# Altium PCB PCBV2-01.PcbDoc (part 1 of 2)
Units mm, origin at the board's own origin, x right, y up, seen from the top; angles counter-clockwise.
Board outline 152.4 x 101.6 mm, 2 copper layers (Top Layer, Bottom Layer); 97 components, 117 nets, 452 pads, 185 vias.
Unrouted connection lines stored in the file: 1.
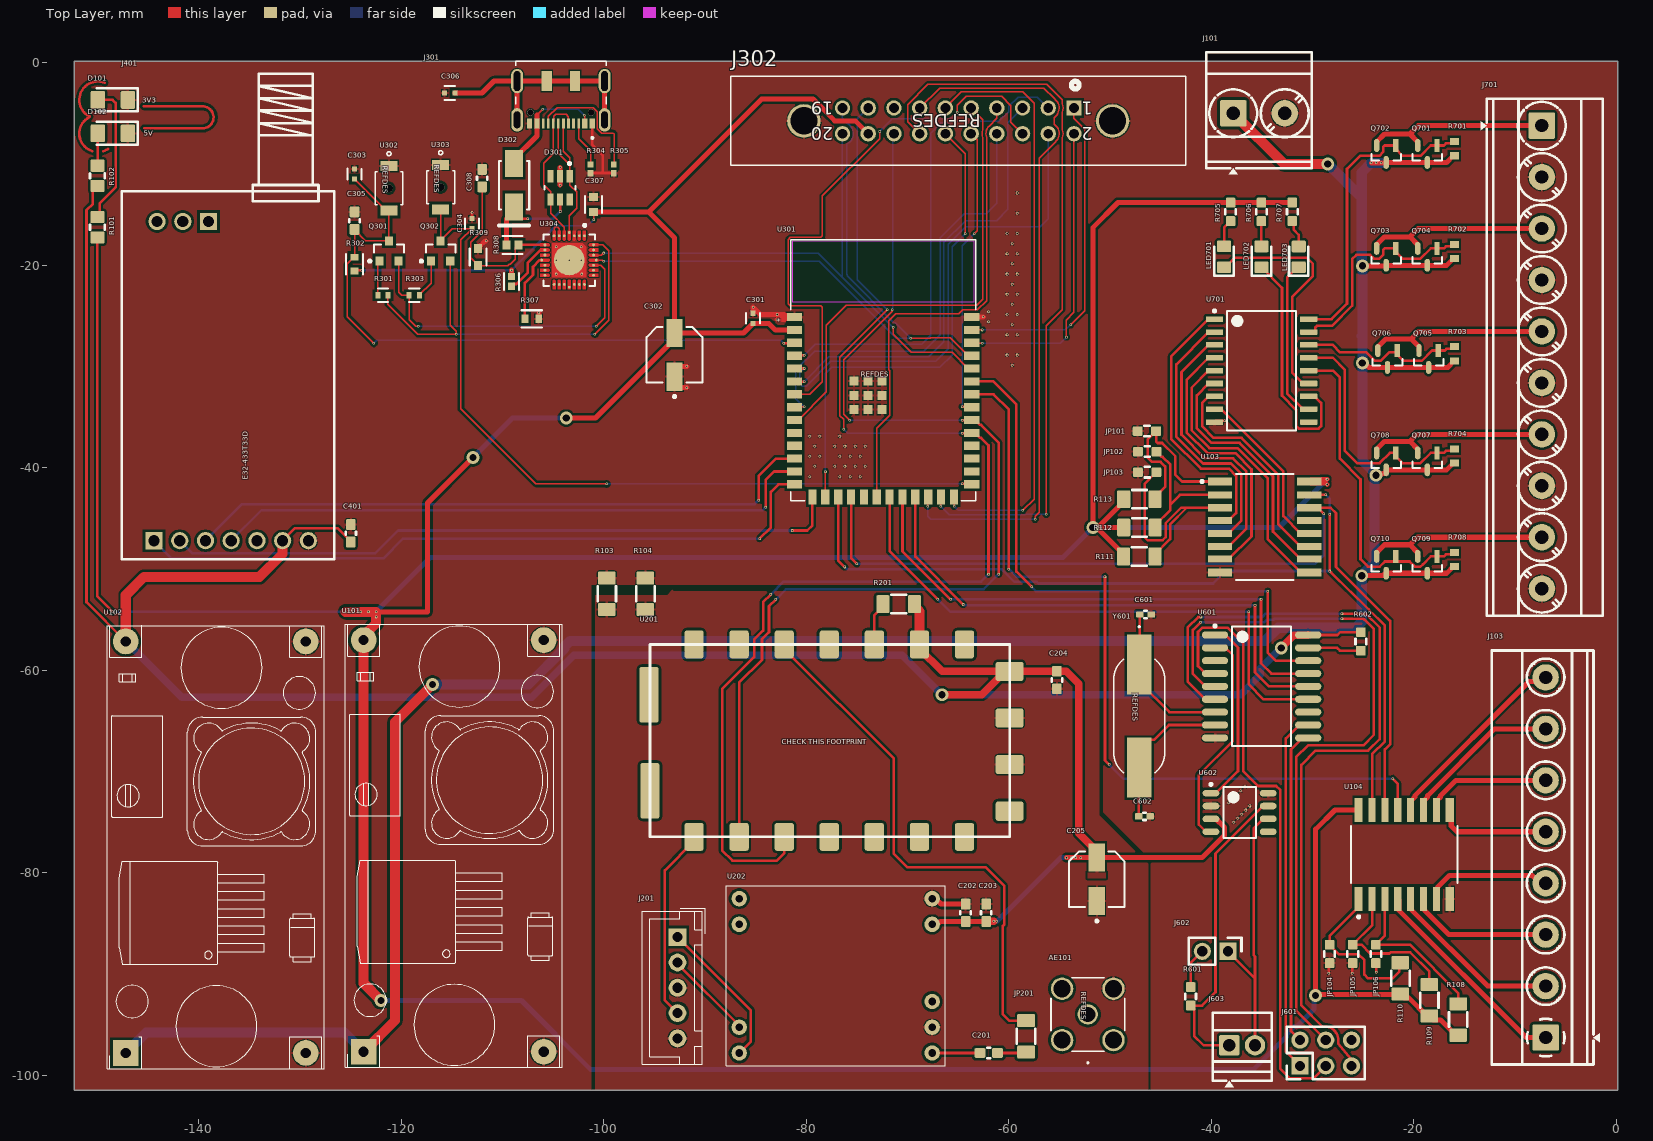
[diagram p0: Top Layer view]
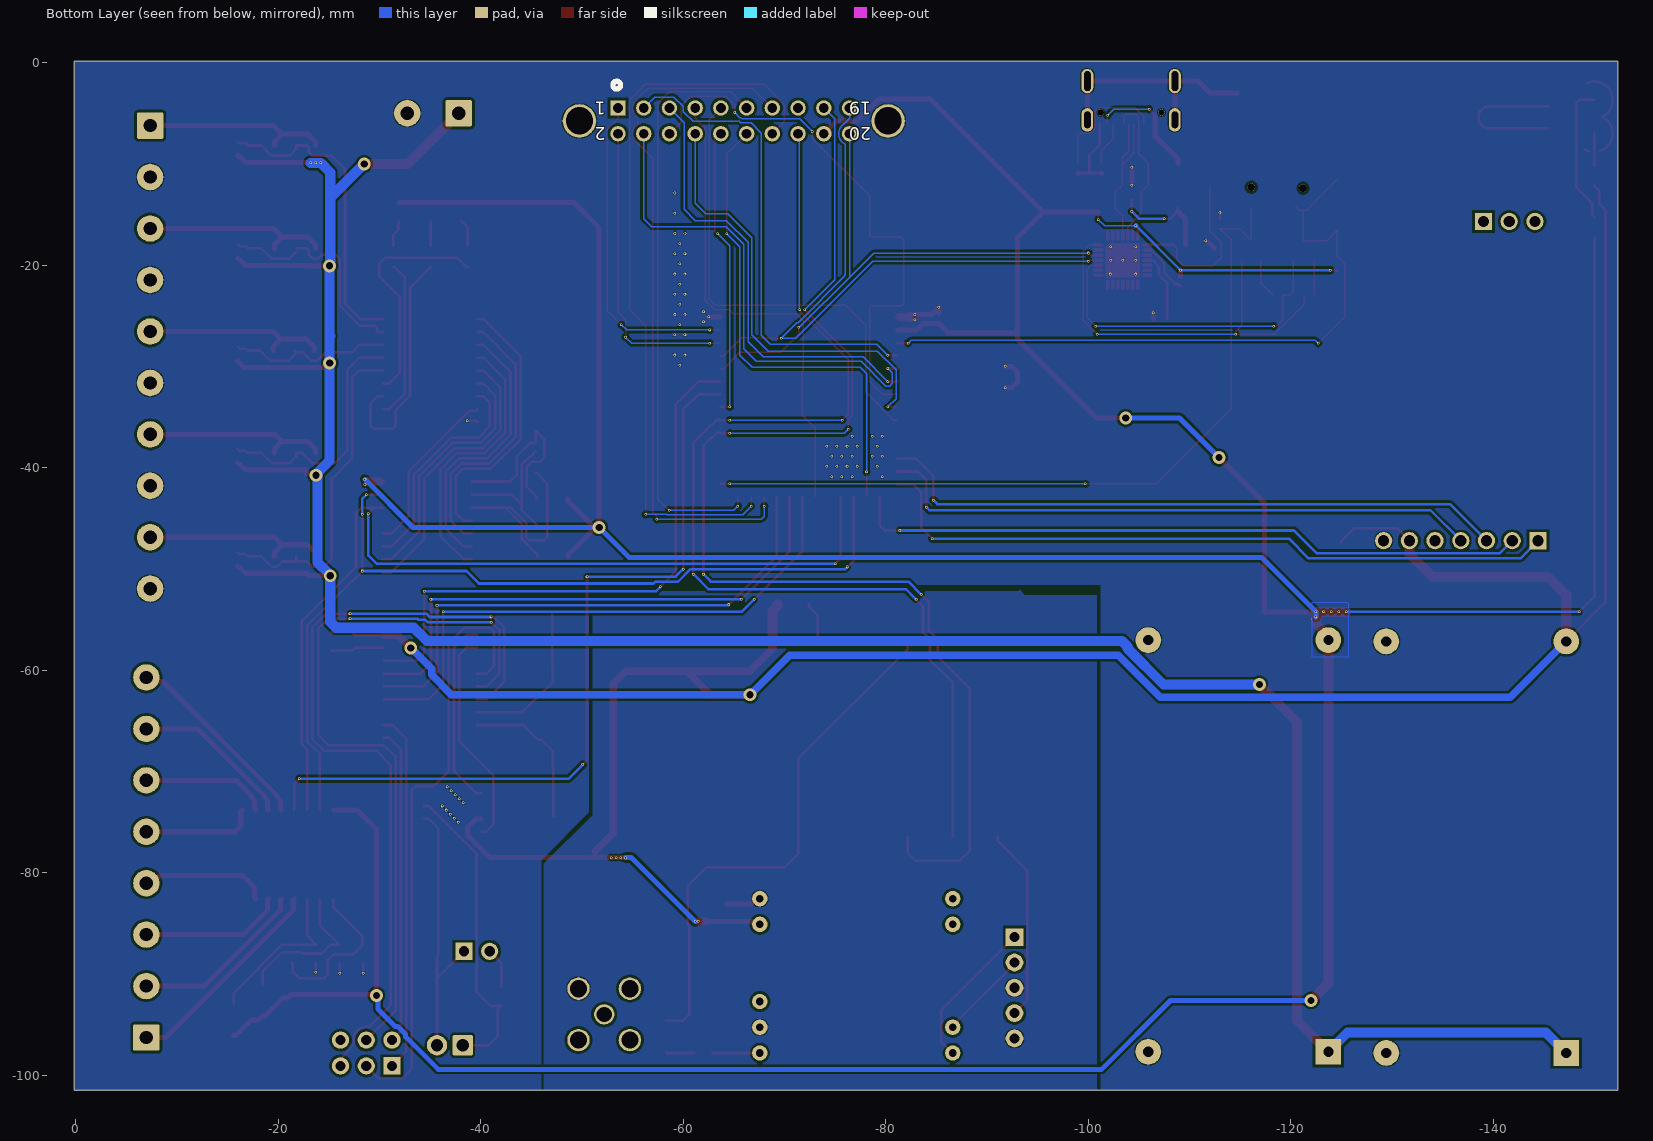
[diagram p1: Bottom Layer view, seen from below]

## Layer stack, top to bottom
Top Solder: solder mask 0.0102, Solder Resist, Dk 3.5
Top Layer: signal copper 0.0356
Dielectric 1: dielectric 0.32, FR-4, Dk 4.8
Bottom Layer: signal copper 0.0356
Bottom Solder: solder mask 0.0102, Solder Resist, Dk 3.5

## Board outline
-152.273,-101.473 0.127,-101.473 0.127,0.127 -152.273,0.127

## Design rules (kind name [scope] priority, off if disabled: settings)
Clearance "QFN28 Clearance" [HasFootprint('FP-CP2102N-A02-GQFN28R-MFG')] p1: gap=0.1 ignorepadtopadclearanceinfootprint=FALSE
Clearance USBC_Footprint [HasFootprint('JAE_DX07S016JA1R1500')] p2: gap=0.1 ignorepadtopadclearanceinfootprint=FALSE
Clearance [All] p3: gap=0.254 ignorepadtopadclearanceinfootprint=TRUE except(0.125: SMDPad-SMDPad)
PolygonConnect [All] p1: connectstyle=Relief reliefconductorwidth=0.254 reliefentries=4 polygonreliefangle="90 Angle" airgapwidth=0.1
RoutingVias [All] p1: holewidth=0.711 width=1.27 viastyle="Through Hole" minholewidth=0.711 minwidth=1.27 maxholewidth=0.711 maxwidth=1.27 useviatemplates=TRUE viatemplateguid#1={12063279-9FBE-486A-9D9A-ABACD37B87B8} viatemplatename#1=v25h15m0mx0
SolderMaskExpansion [All] p1: expansion=0.102 istentingtop=FALSE
SupplyNets "Schematic Supply Nets" [InNet('+3.3V')] p1: voltage=0.000
SupplyNets "Schematic Supply Nets_5" [InNet('+12V')] p2: voltage=0.000
SupplyNets "Schematic Supply Nets_3" [InNet('GNDA')] p3: voltage=0.000
SupplyNets "Schematic Supply Nets_2" [InNet('GNDD')] p4: voltage=0.000
SupplyNets "Schematic Supply Nets_1" [InNet('+5V')] p5: voltage=0.000
UnpouredPolygon USB_C_ModifiedPoly [HasFootprint('JAE_DX07S016JA1R1500')] p1: allowunpoured=TRUE allowshelved=TRUE
UnpouredPolygon [All] p2:
Width [All] p1: maxlimit=1 minlimit=0.125 preferedwidth=0.125 minimp=50.000000 maximp=50.000000 favimp=50.000000
29 further rules are at their usual default settings.

## Classes and differential pairs
component class U_ULN2803+MOSFETS: J701 LED701 LED702 LED703 Q701 Q702 Q703 Q704 Q705 Q706 Q707 Q708 Q709 Q710 R5 R6 R7 R701 R702 R703 R704 R705 R706 R707 R708 U1 U701
component class "RF Voice": C201 C202 C203 C204 C205 J201 J202 JP201 R201 RV201 U201 U202 U203
component class Microcontroller: C301 C302 C303 C304 C305 C306 C307 C308 D301 D302 J301 J302 Q301 Q302 R301 R302 R303 R304 R305 R306 R307 R308 R309 U301 U302 U303 U304
component class LORA: C401 J401
component class Display: J501
component class "CAR PCB": AE101 D101 D102 J101 J103 JP101 JP102 JP103 JP104 JP105 JP106 R101 R102 R103 R104 R108 R109 R110 R111 R112 R113 U101 U102 U103 U104
component class CAN_Module: C601 C602 J601 J602 J603 R601 R602 U601 U602 Y601

## Components (designator, comment, footprint, x,y, rotation, side; value= is the part's Value field where it differs from the comment)
AE101 "Antenna_Shield" 132134_AMP -52.197,-93.98 r270 top
C201 "2.2uF" C_0603_1608Metric_Pad1.08x0.95mm_HandSolder -61.976,-97.79 r180 top
C202 "1uF" C_0603_1608Metric_Pad1.08x0.95mm_HandSolder -64.262,-83.947 r270 top
C203 ".1uF" C_0603_1608Metric_Pad1.08x0.95mm_HandSolder -62.23,-83.947 r270 top
C204 "0.1uF" C_0603_1608Metric_Pad1.08x0.95mm_HandSolder -55.245,-60.96 r270 top
C205 "EEEFK1V100R" FP-FKC-MFG -51.308,-80.636 r90 top
C301 "0.1uF" FP-CC0402-MFG -85.25,-25.25 r90 top value="100 nF"
C302 "EEEFK1V100R" FP-FKC-MFG -93,-28.85 r90 top
C303 "0.1uF" FP-CC0402-MFG -124.6,-11 r90 top value="100 nF"
C304 "0.1uF" FP-CC0402-MFG -113,-15.9 r90 top value="100 nF"
C305 "1uF" C_0603_1608Metric_Pad1.08x0.95mm_HandSolder -124.6,-15.6 r90 top
C306 "0.1uF" FP-CC0402-MFG -115.2,-3 r180 top value="100 nF"
C307 "1uF" FP-CC0603-DA-MFG -101,-14 r90 top value="1 uF"
C308 "1uF" C_0603_1608Metric_Pad1.08x0.95mm_HandSolder -112,-11.4 r90 top
C401 "1uF" C_0603_1608Metric_Pad1.08x0.95mm_HandSolder -124.968,-46.482 r90 top
C601 "30" C_0402_1005Metric_Pad0.74x0.62mm_HandSolder -46.482,-54.483 r180 top
C602 "30" C_0402_1005Metric_Pad0.74x0.62mm_HandSolder -46.609,-74.422 r180 top
D101 "LED" LED_1206_3216Metric_Pad1.42x1.75mm_HandSolder -148.463,-3.683 r180 top
D102 "LED" LED_1206_3216Metric_Pad1.42x1.75mm_HandSolder -148.463,-6.985 r180 top
D301 "USBLC6-4SC6" FP-SOT23-6L-MFG -104.3,-12.375 r270 top value=3pF
D302 "SS16" FAIR-SMA-2_B_V -108.85,-12.1 r270 top
J101 "Screw_Terminal_01x02" TerminalBlock_Phoenix_MKDS-3-2-5.08_1x02_P5.08mm_Horizontal -37.83,-5 r0 top
J103 "XY2500 RDS" TerminalBlock_Phoenix_MKDS-1,5-8-5.08_1x08_P5.08mm_Horizontal -6.985,-96.266 r90 top
J201 "Conn_01x05" JST_XH_B05B-XH-A_05x2.50mm_Straight -92.71,-86.353 r270 top
J301 "DX07S016JA1R1500" JAE_DX07S016JA1R1500 -104.225,-4.925 r180 top
J302 "5499922-4" CON20_2X10_SHM_TEC -53.56,-4.48 r180 top
J401 "LORA Module E32-433D" E32-433T33D-EDITEDSIZE -136.779,-19.685 r90 top
J601 "Conn_02x03_Odd_Even" PinHeader_2x03_P2.54mm_Vertical -31.242,-99.06 r90 top
J602 "Conn_01x02_Pin" PinHeader_1x02_P2.54mm_Vertical -38.35,-87.75 r270 top
J603 "Screw_Terminal_01x02" TerminalBlock_Xinya_XY308-2.54-2P_1x02_P2.54mm_Horizontal -38.227,-97.028 r0 top
J701 "CONN_1924389" TerminalBlock_Phoenix_MKDS-3-10-5.08_1x10_P5.08mm_Horizontal -7.366,-6.223 r270 top
JP101 "SolderJumper_2_Bridged" R_0603_1608Metric_Pad0.98x0.95mm_HandSolder -46.362,-36.381 r0 top
JP102 "SolderJumper_2_Bridged" R_0603_1608Metric_Pad0.98x0.95mm_HandSolder -46.338,-38.413 r0 top
JP103 "SolderJumper_2_Bridged" R_0603_1608Metric_Pad0.98x0.95mm_HandSolder -46.338,-40.445 r0 top
JP104 "SolderJumper_2_Bridged" R_0603_1608Metric_Pad0.98x0.95mm_HandSolder -28.321,-88.011 r90 top
JP105 "SolderJumper_2_Bridged" R_0603_1608Metric_Pad0.98x0.95mm_HandSolder -26.035,-88.011 r90 top
JP106 "SolderJumper_2_Open" R_0603_1608Metric_Pad0.98x0.95mm_HandSolder -23.749,-88.011 r90 top
JP201 "SolderJumper_2_Open" R_1206_3216Metric_Pad1.30x1.75mm_HandSolder -58.293,-96.139 r270 top
LED701 "LED" LED_0805_2012Metric_Pad1.15x1.40mm_HandSolder -38.735,-19.168 r90 top
LED702 "LED" LED_0805_2012Metric_Pad1.15x1.40mm_HandSolder -35.052,-19.177 r90 top
LED703 "LED" LED_0805_2012Metric_Pad1.15x1.40mm_HandSolder -31.369,-19.177 r90 top
Q301 "BC849CLT1G" ONSC-SOT-23-3-318-08_V -121.2,-18.6 r90 top
Q302 "BC849CLT1G" ONSC-SOT-23-3-318-08_V -116.1,-18.6 r90 top
Q701 "3b9c635fedb024a5347a57b145af9cc" FP-S-03946-IPC_C -18.669,-9.017 r270 top
Q702 "3b9c635fedb024a5347a57b145af9cc" FP-S-03946-IPC_C -22.733,-9.017 r270 top
Q703 "3b9c635fedb024a5347a57b145af9cc" FP-S-03946-IPC_C -22.733,-19.177 r270 top
Q704 "3b9c635fedb024a5347a57b145af9cc" FP-S-03946-IPC_C -18.669,-19.177 r270 top
Q705 "3b9c635fedb024a5347a57b145af9cc" FP-S-03946-IPC_C -18.542,-29.264 r270 top
Q706 "3b9c635fedb024a5347a57b145af9cc" FP-S-03946-IPC_C -22.606,-29.264 r270 top
Q707 "3b9c635fedb024a5347a57b145af9cc" FP-S-03946-IPC_C -18.669,-39.37 r270 top
Q708 "3b9c635fedb024a5347a57b145af9cc" FP-S-03946-IPC_C -22.733,-39.37 r270 top
Q709 "3b9c635fedb024a5347a57b145af9cc" FP-S-03946-IPC_C -18.669,-49.584 r270 top
Q710 "3b9c635fedb024a5347a57b145af9cc" FP-S-03946-IPC_C -22.733,-49.584 r270 top
R101 "220" R_0805_2012Metric_Pad1.20x1.40mm_HandSolder -149.987,-16.256 r90 top
R102 "220" R_0805_2012Metric_Pad1.20x1.40mm_HandSolder -149.987,-11.176 r90 top
R103 "0" R_1206_3216Metric_Pad1.30x1.75mm_HandSolder -99.695,-52.451 r270 top
R104 "0" R_1206_3216Metric_Pad1.30x1.75mm_HandSolder -95.885,-52.451 r270 top
R108 "10k" R_1206_3216Metric_Pad1.30x1.75mm_HandSolder -15.621,-94.488 r90 top
R109 "1k" R_1206_3216Metric_Pad1.30x1.75mm_HandSolder -18.479,-92.583 r90 top value=10k
R110 "1k" R_1206_3216Metric_Pad1.30x1.75mm_HandSolder -21.336,-90.424 r90 top value=10k
R111 "1k" R_1206_3216Metric_Pad1.30x1.75mm_HandSolder -47.117,-48.768 r0 top value=10k
R112 "1k" R_1206_3216Metric_Pad1.30x1.75mm_HandSolder -47.1,-45.906 r0 top value=10k
R113 "1k" R_1206_3216Metric_Pad1.30x1.75mm_HandSolder -47.1,-43.112 r0 top value=10k
R201 "10k" R_1206_3216Metric_Pad1.30x1.75mm_HandSolder -70.866,-53.467 r180 top
R301 "AC0402FR-0710KL" FP-AC0402-MFG -121.8,-22.973 r180 top
R302 "10k" FP-RC0603-0_55-IPC_C -124.6,-19.9 r270 top
R303 "AC0402FR-0710KL" FP-AC0402-MFG -118.708,-22.973 r0 top
R304 "5.1k" RESC1005X40X25NL05T10 -101.3,-10.5 r90 top
R305 "5.1k" RESC1005X40X25NL05T10 -99,-10.5 r90 top
R306 "1k" FP-RC0402-0_4-IPC_A -109.1,-21.6 r90 top
R307 "10k" FP-RC0603-0_55-IPC_C -107.1,-25.3 r180 top
R308 "22.1k" FP-RMCF0603-IPC_C -109,-18 r0 top
R309 "47.5k" FP-AC0603-MFG -112.4,-19.2 r90 top
R601 "120" R_0603_1608Metric_Pad0.98x0.95mm_HandSolder -42.037,-92.202 r270 top
R602 "10k" R_0603_1608Metric_Pad0.98x0.95mm_HandSolder -25.238,-57.158 r90 top
R701 "RC0603FR-075K6L" RESC1608X55X25NL10T15 -16.002,-8.496 r270 top
R702 "RC0603FR-075K6L" RESC1608X55X25NL10T15 -16.002,-18.656 r270 top
R703 "RC0603FR-075K6L" RESC1608X55X25NL10T15 -16.002,-28.743 r270 top
R704 "RC0603FR-075K6L" RESC1608X55X25NL10T15 -16.002,-38.849 r270 top
R705 "470" R_0603_1608Metric_Pad0.98x0.95mm_HandSolder -38.1,-14.732 r90 top
R706 "470" R_0603_1608Metric_Pad0.98x0.95mm_HandSolder -35.052,-14.732 r90 top
R707 "470" R_0603_1608Metric_Pad0.98x0.95mm_HandSolder -32.004,-14.732 r90 top
R708 "RC0603FR-075K6L" RESC1608X55X25NL10T15 -16.002,-49.063 r270 top
U101 "DC DC_StepDown_LM2596" YAAJ_DCDC_StepDown_LM2596 -123.698,-97.663 r90 top
U102 "DC DC_StepDown_LM2596" YAAJ_DCDC_StepDown_LM2596 -147.193,-97.79 r90 top
U103 "PCF8574T/3,518" FP-SOT162-1-MFG -34.736,-45.856 r0 top
U104 "PCF8574T/3,518" FP-SOT162-1-MFG -20.955,-78.191 r90 top
U201 "~" SA868 -59.924,-76.454 r180 top
U202 "pam8403" pam8403 -77.724,-90.17 r90 top
U301 "ESP32-S3-WROOM-1-N16R8" ESP32-S3-WROOM-1_EXP -72.4,-30.39 r0 top
U302 "B3U-1000P-B" B3U-1000P-B -121.2,-12.4 r270 top
U303 "B3U-1000P-B" B3U-1000P-B -116.1,-12.3 r270 top
U304 "CP2102N-A02-GQFN28R" FP-CP2102N-A02-GQFN28R-MFG -103.4,-19.5 r270 top
U601 "MCP2515-xSO" SOIC-SO18_M -35.035,-61.595 r0 top
U602 "TJA1051T" NXP-SOIC-8_M -37.211,-74.041 r0 top
U701 "ULN2803A_DW_18" DW0018A_L -35.035,-30.412 r0 top
Y601 "X49SM8MSD2SC" H32_RAM -47.117,-64.516 r270 top

## Footprints (in the part's own frame and the unit in brackets; to place one, negate y for a bottom-side part, rotate by r counter-clockwise, add the part's x,y. Pads: shape width x height; smd on the part's side, far side on the other; paste and mask are expansions set on the pad)
132134_AMP [mil]
  round 79 / inner round 60 / far side round 79 hole 59 paste-99999 mask+0: 1(0,0)
  round 87 / inner round 60 / far side round 87 hole 67 paste-99999 mask+0: 2(-100,100) 3(-100,-100) 4(100,-100) 5(100,100)
  silkscreen extent -143,-143 191,143
B3U-1000P-B [mm]
  rect 1x1.7 smd paste+0 mask+0: 1(-2.2,0) 2(2.2,0)
  round 0.75 / inner round 1.524 / far side round 0.75 hole 0.75 unplated paste-2539.97 mask+0: 3(0,0)
  silkscreen extent -3.61,-1.38 1.63,1.38
C_0402_1005Metric_Pad0.74x0.62mm_HandSolder [mm]
  rrect25% 0.735x0.62 smd: 1(-0.567,0) 2(0.567,0)
  silkscreen extent -0.12,-0.36 0.12,0.36
C_0603_1608Metric_Pad1.08x0.95mm_HandSolder [mm]
  rrect25% 1.075x0.95 smd: 1(-0.862,0) 2(0.862,0)
  silkscreen extent -0.15,-0.51 0.15,0.51
CON20_2X10_SHM_TEC [mil]
  rect 60x60 / inner round 60 / far side rect 60x60 hole 38 paste-99999 mask-30: 1(0,0)
  round 60 hole 38 paste-99999 mask-30: 2(0,100) 3(100,0) 4(100,100) 5(200,0) 6(200,100) 7(300,0) 8(300,100) 9(400,0) 10(400,100) 11(500,0) 12(500,100) 13(600,0) 14(600,100) 15(700,0) 16(700,100) 17(800,0) 18(800,100) 19(900,0) 20(900,100)
  round 130 / inner round 60 / far side round 130 hole 106 paste-99999 mask-65: 21(-150,50) 22(1050,50)
  silkscreen extent -435,-123 1335,223
DW0018A_L [mm] "SOIC, 18-Leads, Body 11.8x7.6mm, Pitch 1.27mm, IPC High Density"
  rrect18% 1.7x0.55 smd: 1(-4.65,5.08) 2(-4.65,3.81) 3(-4.65,2.54) 4(-4.65,1.27) 5(-4.65,0) 6(-4.65,-1.27) 7(-4.65,-2.54) 8(-4.65,-3.81) 9(-4.65,-5.08) 10(4.65,-5.08) 11(4.65,-3.81) 12(4.65,-2.54) 13(4.65,-1.27) 14(4.65,0) 15(4.65,1.27) 16(4.65,2.54) 17(4.65,3.81) 18(4.65,5.08)
  silkscreen extent -4.77,-5.9 3.4,6.03, body extent -3.8,-5.9 3.8,5.9, height 2.65
E32-433T33D-EDITEDSIZE [mm]
  rect 1.7x1.7 hole 1.1: 1(-27.52,7.62) 12(4,2.24)
  round 1.7 hole 1.1: 2(-27.52,5.08) 3(-27.52,2.54) 4(-27.52,0) 5(-27.52,-2.54) 6(-27.52,-5.08) 7(-27.52,-7.62) 13(4,4.78) 14(4,7.32)
  silkscreen extent -29.34,-10.18 18.6,10.82
ESP32-S3-WROOM-1_EXP [mil]
  rect 59x32 smd paste+0 mask+0: 1(-344.49,207.09) 2(-344.49,157.09) 3(-344.49,107.09) 4(-344.49,57.09) 5(-344.49,7.09) 6(-344.49,-42.91) 7(-344.49,-92.91) 8(-344.49,-142.91) 9(-344.49,-192.91) 10(-344.49,-242.91) 11(-344.49,-292.91) 12(-344.49,-342.91) 13(-344.49,-392.91) 14(-344.49,-442.91) 27(344.49,-442.91) 28(344.49,-392.91) 29(344.49,-342.91) 30(344.49,-292.91) 31(344.49,-242.91) 32(344.49,-192.91) 33(344.49,-142.91) 34(344.49,-92.91) 35(344.49,-42.91) 36(344.49,7.09) 37(344.49,57.09) 38(344.49,107.09) 39(344.49,157.09) 40(344.49,207.09)
  rect 32x59 smd paste+0 mask+0: 15(-275,-492.13) 16(-225,-492.13) 17(-175,-492.13) 18(-125,-492.13) 19(-75,-492.13) 20(-25,-492.13) 21(25,-492.13) 22(75,-492.13) 23(125,-492.13) 24(175,-492.13) 25(225,-492.13) 26(275,-492.13)
  rect 35x35 smd paste+0 mask+0: 41(-59.05,-96.85) 42(-114.17,-41.73) 43(-114.17,-96.85) 44(-114.17,-151.97) 45(-59.05,-151.97) 46(-3.94,-151.97) 47(-3.94,-96.85) 48(-3.94,-41.73) 49(-59.05,-41.73)
  Top Layer keep-out region: 354.5,502 -354.5,502 -354.5,266 354.5,266
  silkscreen extent -360,-507 359,507, body extent -354,-502 354,502, height 128
FAIR-SMA-2_B_V [mm] "Molded Diode, 2-Leads, Body 4.75x2.95mm"
  rect 2.65x1.75 smd: 1(-2.15,0) 2(2.15,0)
  silkscreen extent -2.4,-1.5 3.97,1.5, body extent -2.6,-1.48 2.6,1.48, height 2.7
FP-AC0402-MFG [mm]
  rect 0.5x0.6 smd paste+0 mask+0: 1(-0.5,0) 2(0.5,0)
  silkscreen extent -0.5,-0.68 0.5,0.67, body extent -0.85,-0.4 0.85,0.4, height 0.25
FP-AC0603-MFG [mm]
  rect 0.9x0.8 smd paste+0 mask+0: 1(-0.85,0) 2(0.85,0)
  silkscreen extent -0.85,-0.83 0.85,0.83, body extent -1.4,-0.55 1.4,0.55, height 0.25
FP-CC0402-MFG [mm]
  rect 0.5x0.5 smd paste+0 mask+0: 1(-0.5,0) 2(0.5,0)
  silkscreen extent -0.53,-0.68 0.52,0.67, body extent -0.87,-0.48 0.87,0.48, height 0.25
FP-CC0603-DA-MFG [mm]
  rect 0.8x0.9 smd paste+0 mask+0: 1(-0.75,0) 2(0.75,0)
  silkscreen extent -0.85,-0.85 0.85,0.85, body extent -1.35,-0.75 1.35,0.75, height 0.25
FP-CP2102N-A02-GQFN28R-MFG [mm]
  round 0.27 smd paste+0 mask+0: 1(-2.4,1.5) 2(-2.4,1) 3(-2.4,0.5) 4(-2.725,0) 5(-2.4,-0.5) 6(-2.4,-1) 7(-2.4,-1.5) 8(-1.5,-2.4) 9(-1,-2.4) 10(-0.5,-2.4) 11(0,-2.725) 12(0.5,-2.4) 13(1,-2.4) 14(1.5,-2.4) 15(2.4,-1.5) 16(2.4,-1) 17(2.4,-0.5) 18(2.675,0) 19(2.4,0.5) 20(2.4,1) 21(2.4,1.5) 22(1.5,2.4) 23(1,2.4) 24(0.5,2.4) 25(0,2.675) 26(-0.5,2.4) 27(-1,2.4) 28(-1.5,2.4)
  round 3.015 smd paste-1000 mask+0: 29(0,0)
  Top Layer region: -1.325,1.675 1.675,1.675 1.675,-1.675 -1.675,-1.675 -1.675,1.325 -1.325,1.675
  Top Layer region: -1.35,2.875 -1.35,2.075 -1.361,2.018 -1.394,1.969 -1.443,1.936 -1.5,1.925 -1.5,1.925 -1.557,1.936 -1.606,1.969 -1.639,2.018 -1.65,2.075 -1.65,2.075 -1.65,2.875
  Top Layer region: -0.85,2.875 -0.85,2.075 -0.861,2.018 -0.894,1.969 -0.943,1.936 -1,1.925 -1,1.925 -1.057,1.936 -1.106,1.969 -1.139,2.018 -1.15,2.075 -1.15,2.075 -1.15,2.875
  Top Layer region: -0.35,2.875 -0.35,2.075 -0.361,2.018 -0.394,1.969 -0.443,1.936 -0.5,1.925 -0.5,1.925 -0.557,1.936 -0.606,1.969 -0.639,2.018 -0.65,2.075 -0.65,2.075 -0.65,2.875
  Top Layer region: 0.15,2.875 0.15,2.075 0.139,2.018 0.106,1.969 0.057,1.936 0,1.925 0,1.925 -0.057,1.936 -0.106,1.969 -0.139,2.018 -0.15,2.075 -0.15,2.075 -0.15,2.875
  Top Layer region: 0.65,2.875 0.65,2.075 0.639,2.018 0.606,1.969 0.557,1.936 0.5,1.925 0.5,1.925 0.443,1.936 0.394,1.969 0.361,2.018 0.35,2.075 0.35,2.075 0.35,2.875
  Top Layer region: 1.15,2.875 1.15,2.075 1.139,2.018 1.106,1.969 1.057,1.936 1,1.925 1,1.925 0.943,1.936 0.894,1.969 0.861,2.018 0.85,2.075 0.85,2.075 0.85,2.875
  Top Layer region: 1.65,2.875 1.65,2.075 1.639,2.018 1.606,1.969 1.557,1.936 1.5,1.925 1.5,1.925 1.443,1.936 1.394,1.969 1.361,2.018 1.35,2.075 1.35,2.075 1.35,2.875
  Top Layer region: 2.875,1.35 2.075,1.35 2.018,1.361 1.969,1.394 1.936,1.443 1.925,1.5 1.925,1.5 1.936,1.557 1.969,1.606 2.018,1.639 2.075,1.65 2.075,1.65 2.875,1.65
  Top Layer region: 2.875,0.85 2.075,0.85 2.018,0.861 1.969,0.894 1.936,0.943 1.925,1 1.925,1 1.936,1.057 1.969,1.106 2.018,1.139 2.075,1.15 2.075,1.15 2.875,1.15
  Top Layer region: 2.875,0.35 2.075,0.35 2.018,0.361 1.969,0.394 1.936,0.443 1.925,0.5 1.925,0.5 1.936,0.557 1.969,0.606 2.018,0.639 2.075,0.65 2.075,0.65 2.875,0.65
  Top Layer region: 2.875,-0.15 2.075,-0.15 2.018,-0.139 1.969,-0.106 1.936,-0.057 1.925,0 1.925,0 1.936,0.057 1.969,0.106 2.018,0.139 2.075,0.15 2.075,0.15 2.875,0.15
  Top Layer region: 2.875,-0.65 2.075,-0.65 2.018,-0.639 1.969,-0.606 1.936,-0.557 1.925,-0.5 1.925,-0.5 1.936,-0.443 1.969,-0.394 2.018,-0.361 2.075,-0.35 2.075,-0.35 2.875,-0.35
  Top Layer region: 2.875,-1.15 2.075,-1.15 2.018,-1.139 1.969,-1.106 1.936,-1.057 1.925,-1 1.925,-1 1.936,-0.943 1.969,-0.894 2.018,-0.861 2.075,-0.85 2.075,-0.85 2.875,-0.85
  Top Layer region: 2.875,-1.65 2.075,-1.65 2.018,-1.639 1.969,-1.606 1.936,-1.557 1.925,-1.5 1.925,-1.5 1.936,-1.443 1.969,-1.394 2.018,-1.361 2.075,-1.35 2.075,-1.35 2.875,-1.35
  Top Layer region: 1.35,-2.875 1.35,-2.075 1.361,-2.018 1.394,-1.969 1.443,-1.936 1.5,-1.925 1.5,-1.925 1.557,-1.936 1.606,-1.969 1.639,-2.018 1.65,-2.075 1.65,-2.075 1.65,-2.875
  Top Layer region: 0.85,-2.875 0.85,-2.075 0.861,-2.018 0.894,-1.969 0.943,-1.936 1,-1.925 1,-1.925 1.057,-1.936 1.106,-1.969 1.139,-2.018 1.15,-2.075 1.15,-2.075 1.15,-2.875
  Top Layer region: 0.35,-2.875 0.35,-2.075 0.361,-2.018 0.394,-1.969 0.443,-1.936 0.5,-1.925 0.5,-1.925 0.557,-1.936 0.606,-1.969 0.639,-2.018 0.65,-2.075 0.65,-2.075 0.65,-2.875
  Top Layer region: -0.15,-2.875 -0.15,-2.075 -0.139,-2.018 -0.106,-1.969 -0.057,-1.936 0,-1.925 0,-1.925 0.057,-1.936 0.106,-1.969 0.139,-2.018 0.15,-2.075 0.15,-2.075 0.15,-2.875
  Top Layer region: -0.65,-2.875 -0.65,-2.075 -0.639,-2.018 -0.606,-1.969 -0.557,-1.936 -0.5,-1.925 -0.5,-1.925 -0.443,-1.936 -0.394,-1.969 -0.361,-2.018 -0.35,-2.075 -0.35,-2.075 -0.35,-2.875
  Top Layer region: -1.15,-2.875 -1.15,-2.075 -1.139,-2.018 -1.106,-1.969 -1.057,-1.936 -1,-1.925 -1,-1.925 -0.943,-1.936 -0.894,-1.969 -0.861,-2.018 -0.85,-2.075 -0.85,-2.075 -0.85,-2.875
  Top Layer region: -1.65,-2.875 -1.65,-2.075 -1.639,-2.018 -1.606,-1.969 -1.557,-1.936 -1.5,-1.925 -1.5,-1.925 -1.443,-1.936 -1.394,-1.969 -1.361,-2.018 -1.35,-2.075 -1.35,-2.075 -1.35,-2.875
  Top Layer region: -2.875,-1.35 -2.075,-1.35 -2.018,-1.361 -1.969,-1.394 -1.936,-1.443 -1.925,-1.5 -1.925,-1.5 -1.936,-1.557 -1.969,-1.606 -2.018,-1.639 -2.075,-1.65 -2.075,-1.65 -2.875,-1.65
  Top Layer region: -2.875,-0.85 -2.075,-0.85 -2.018,-0.861 -1.969,-0.894 -1.936,-0.943 -1.925,-1 -1.925,-1 -1.936,-1.057 -1.969,-1.106 -2.018,-1.139 -2.075,-1.15 -2.075,-1.15 -2.875,-1.15
  Top Layer region: -2.875,-0.35 -2.075,-0.35 -2.018,-0.361 -1.969,-0.394 -1.936,-0.443 -1.925,-0.5 -1.925,-0.5 -1.936,-0.557 -1.969,-0.606 -2.018,-0.639 -2.075,-0.65 -2.075,-0.65 -2.875,-0.65
  Top Layer region: -2.875,0.15 -2.075,0.15 -2.018,0.139 -1.969,0.106 -1.936,0.057 -1.925,0 -1.925,0 -1.936,-0.057 -1.969,-0.106 -2.018,-0.139 -2.075,-0.15 -2.075,-0.15 -2.875,-0.15
  Top Layer region: -2.875,0.65 -2.075,0.65 -2.018,0.639 -1.969,0.606 -1.936,0.557 -1.925,0.5 -1.925,0.5 -1.936,0.443 -1.969,0.394 -2.018,0.361 -2.075,0.35 -2.075,0.35 -2.875,0.35
  Top Layer region: -2.875,1.15 -2.075,1.15 -2.018,1.139 -1.969,1.106 -1.936,1.057 -1.925,1 -1.925,1 -1.936,0.943 -1.969,0.894 -2.018,0.861 -2.075,0.85 -2.075,0.85 -2.875,0.85
  Top Layer region: -2.875,1.65 -2.075,1.65 -2.018,1.639 -1.969,1.606 -1.936,1.557 -1.925,1.5 -1.925,1.5 -1.936,1.443 -1.969,1.394 -2.018,1.361 -2.075,1.35 -2.075,1.35 -2.875,1.35
  silkscreen extent -3.55,-2.55 2.55,2.55, body extent -2.98,-2.98 2.98,2.98, height 0.25
FP-FKC-MFG [mm]
  rect 2.8x1.6 smd paste+0 mask+0: 1(-2.15,0) 2(2.15,0)
  silkscreen extent -4.25,-2.75 2.76,2.75, body extent -3.8,-3 3.8,3, height 0.25
FP-RC0402-0_4-IPC_A [mm]
  rect 0.715x0.672 smd paste+0 mask+0: 1(-0.479,0) 2(0.479,0)
  silkscreen extent -0.84,-0.74 0.84,0.74, body extent -1.04,-0.54 1.04,0.54, height 0.25
FP-RC0603-0_55-IPC_C [mm]
  rect 0.659x0.812 smd paste+0 mask+0: 1(-0.677,0) 2(0.677,0)
  silkscreen extent -1.01,-0.85 1.01,0.85, body extent -1.11,-0.55 1.11,0.55, height 0.25
FP-RMCF0603-IPC_C [mm]
  rect 0.806x0.858 smd paste+0 mask+0: 1(-0.601,0) 2(0.601,0)
  silkscreen extent -1,-0.87 1,0.88, body extent -1.1,-0.58 1.1,0.58, height 0.25
FP-S-03946-IPC_C [mm]
  rect 1.274x0.536 smd paste+0 mask+0: 1(-0.835,0.95)
  rrect100% 1.274x0.536 smd paste+0 mask+0: 2(-0.835,-0.95) 3(0.835,0)
  silkscreen extent 0,-1.46 0.65,1.46, body extent -1.57,-1.56 1.57,1.56, height 0.25
FP-SOT23-6L-MFG [mm]
  rect 1.2x0.6 smd paste+0 mask+0: 1(-1.15,0.95) 2(-1.15,0) 3(-1.15,-0.95) 4(1.15,-0.95) 5(1.15,0) 6(1.15,0.95)
  silkscreen extent -2.52,-1.52 0.17,1.52, body extent -1.85,-1.63 1.85,1.63, height 0.25
FP-SOT162-1-MFG [mm]
  rect 2.4x0.8 smd paste+0 mask+0: 1(-4.4,4.495) 8(-4.4,-4.495) 9(4.4,-4.495) 16(4.4,4.495)
  rect 2.4x0.7 smd paste+0 mask+0: 2(-4.4,3.175) 3(-4.4,1.905) 4(-4.4,0.635) 5(-4.4,-0.635) 6(-4.4,-1.905) 7(-4.4,-3.175) 10(4.4,-3.175) 11(4.4,-1.905) 12(4.4,-0.635) 13(4.4,0.635) 14(4.4,1.905) 15(4.4,3.175)
  silkscreen extent -6.29,-5.25 2.82,5.25, body extent -5.72,-5.95 5.72,5.95, height 0.25
H32_RAM [mm]
  rect 5.912x2.432 smd paste+0 mask+0: 1(-5.088,0) 2(5.088,0)
  silkscreen extent -8.89,-2.53 5.59,2.53, body extent -7.54,-2.4 7.54,2.4, height 3.25
JAE_DX07S016JA1R1500 [mm]
  rect 0.52x1 smd: 1(-3.1,1.1) 2(-2.35,1.1) 11(2.35,1.1) 12(3.1,1.1)
  rect 0.27x1 smd: 3(-1.75,1.1) 4(-1.25,1.1) 5(-0.75,1.1) 6(-0.25,1.1) 7(0.25,1.1) 8(0.75,1.1) 9(1.25,1.1) 10(1.75,1.1)
  rect 1x2 smd: S1(-1.4,-3.1) S2(1.4,-3.1)
  oval 1.158x2.316 hole 0.65 slot 1.65 at 90 deg: S3(-4.32,0.725) S4(4.32,0.725)
  oval 1.2x2.4 hole 0.65 slot 1.95 at 90 deg: S5(-4.32,-3.1) S6(4.32,-3.1)
  round 0.63 hole 0.63 unplated: ""(-3,0) ""(3,0)
  round 0.6 hole 0.6 unplated: ""(3,0)
  silkscreen extent -4.47,-5.05 4.47,2.6
JST_XH_B05B-XH-A_05x2.50mm_Straight [mm]
  rect 1.75x1.75 hole 1: 1(0,0)
  round 1.75 hole 1: 2(2.5,0) 3(5,0) 4(7.5,0) 5(10,0)
  silkscreen extent -2.85,-3.5 12.55,2.75
LED_0805_2012Metric_Pad1.15x1.40mm_HandSolder [mm]
  rrect22% 1.15x1.4 smd: 1(-1.025,0) 2(1.025,0)
  silkscreen extent -1.86,-0.96 1,0.96
LED_1206_3216Metric_Pad1.42x1.75mm_HandSolder [mm]
  rrect18% 1.425x1.75 smd: 1(-1.487,0) 2(1.488,0)
  silkscreen extent -2.46,-1.14 1.6,1.13
NXP-SOIC-8_M [mm] "SOIC, 8-Leads, Body 5x4mm, Pitch 1.27mm, IPC Low Density"
  oval 1.65x0.65 smd: 1(-2.825,1.905) 2(-2.825,0.635) 3(-2.825,-0.635) 4(-2.825,-1.905) 5(2.825,-1.905) 6(2.825,-0.635) 7(2.825,0.635) 8(2.825,1.905)
  silkscreen extent -2.95,-2.5 1.6,2.9, body extent -3,-2.5 3,2.5, height 1.75
ONSC-SOT-23-3-318-08_V [mm] "SOT23, 3-Leads, Body 2.92x1.3mm, Pitch 0.95mm"
  rect 0.9x0.8 smd: 1(-1,0.95) 2(-1,-0.95) 3(1,0)
  silkscreen extent -1.12,-1.46 0.65,2.02, body extent -0.65,-1.46 0.65,1.46, height 1.11
pam8403 [mil]
  round 60 hole 30: 1(-300,-400) 2(-200,-400) 3(-100,-400) 4(200,-400) 5(300,-400) 6(300,350) 7(200,350) 8(-200,350) 9(-300,350)
  silkscreen extent -350,-450 350,400
PinHeader_1x02_P2.54mm_Vertical [mm]
  rect 1.7x1.7 hole 1: 1(0,0)
  rrect100% 1.7x1.7 hole 1: 2(0,-2.54)
  silkscreen extent -1.33,-3.87 1.33,1.33
PinHeader_2x03_P2.54mm_Vertical [mm]
  rect 1.7x1.7 hole 1: 1(0,0)
  rrect100% 1.7x1.7 hole 1: 2(2.54,0) 3(0,-2.54) 4(2.54,-2.54) 5(0,-5.08) 6(2.54,-5.08)
  silkscreen extent -1.33,-6.41 3.87,1.33
R_0603_1608Metric_Pad0.98x0.95mm_HandSolder [mm]
  rrect25% 0.975x0.95 smd: 1(-0.913,0) 2(0.913,0)
  silkscreen extent -0.25,-0.52 0.25,0.52
R_0805_2012Metric_Pad1.20x1.40mm_HandSolder [mm]
  rrect21% 1.2x1.4 smd: 1(-1,0) 2(1,0)
  silkscreen extent -0.23,-0.74 0.23,0.73
R_1206_3216Metric_Pad1.30x1.75mm_HandSolder [mm]
  rrect19% 1.3x1.75 smd: 1(-1.55,0) 2(1.55,0)
  silkscreen extent -0.73,-0.91 0.73,0.91
RESC1005X40X25NL05T10 [mm] "Chip Resistor, 2-Leads, Body 1.00x0.50mm, IPC Medium Density"
  rect 0.6x0.55 smd: 1(-0.425,0) 2(0.425,0)
  body extent -0.53,-0.27 0.53,0.28, height 0.4
RESC1608X55X25NL10T15 [mm] "Chip Resistor, 2-Leads, Body 1.70x0.90mm, IPC Medium Density"
  rect 0.7x0.9 smd: 1(-0.7,0) 2(0.7,0)
  body extent -0.85,-0.45 0.85,0.45, height 0.55
SA868 [mm]
  rrect25% 1.9x2.75 smd: 1(31.15,-19) 2(26.7,-19) 3(22.25,-19) 4(17.8,-19) 5(13.35,-19) 6(8.9,-19) 7(4.45,-19) 12(4.45,0) 13(8.9,0) 14(13.35,0) 15(17.8,0) 16(22.25,0) 17(26.7,0) 18(31.15,0)
  rrect25% 2.75x1.9 smd: 8(0,-16.34) 9(0,-11.74) 10(0,-7.14) 11(0,-2.54)
  rrect25% 1.9x5.5 smd: Un1(35.51,-4.55) Un2(35.6,-14.04)
  silkscreen extent 0,-19 35.5,0
SOIC-SO18_M [mm] "SOIC, 18-Leads, Body 11.6x7.5mm, Pitch 1.27mm, IPC Low Density"
  oval 2.6x0.7 smd: 1(-4.6,5.08) 2(-4.6,3.81) 3(-4.6,2.54) 4(-4.6,1.27) 5(-4.6,0) 6(-4.6,-1.27) 7(-4.6,-2.54) 8(-4.6,-3.81) 9(-4.6,-5.08) 10(4.6,-5.08) 11(4.6,-3.81) 12(4.6,-2.54) 13(4.6,-1.27) 14(4.6,0) 15(4.6,1.27) 16(4.6,2.54) 17(4.6,3.81) 18(4.6,5.08)
  silkscreen extent -4.72,-5.9 2.9,6.1, body extent -3.8,-5.87 3.8,5.87, height 2.65
TerminalBlock_Phoenix_MKDS-1,5-8-5.08_1x08_P5.08mm_Horizontal [mm]
  rrect10% 2.6x2.6 hole 1.3: 1(0,0)
  round 2.6 hole 1.3: 2(5.08,0) 3(10.16,0) 4(15.24,0) 5(20.32,0) 6(25.4,0) 7(30.48,0) 8(35.56,0)
  silkscreen extent -2.66,-5.33 38.22,5.32
TerminalBlock_Phoenix_MKDS-3-2-5.08_1x02_P5.08mm_Horizontal [mm]
  rrect10% 2.6x2.6 hole 1.3: 1(0,0)
  round 2.6 hole 1.3: 2(5.08,0)
  silkscreen extent -2.66,-6.03 7.74,6.02
TerminalBlock_Phoenix_MKDS-3-10-5.08_1x10_P5.08mm_Horizontal [mm]
  rrect10% 2.6x2.6 hole 1.3: 1(0,0)
  round 2.6 hole 1.3: 2(5.08,0) 3(10.16,0) 4(15.24,0) 5(20.32,0) 6(25.4,0) 7(30.48,0) 8(35.56,0) 9(40.64,0) 10(45.72,0)
  silkscreen extent -2.66,-6.03 48.38,6.02
TerminalBlock_Xinya_XY308-2.54-2P_1x02_P2.54mm_Horizontal [mm]
  rrect12% 2x2 hole 1.2: 1(0,0)
  round 2 hole 1.2: 2(2.54,0)
  silkscreen extent -1.64,-4.13 4.18,3.22
YAAJ_DCDC_StepDown_LM2596 [mm]
  rect 2.54x2.54 hole 1: 1(0,0)
  round 2.54 hole 1: 2(0,-17.78) 3(40.64,-17.78) 4(40.64,0)
  silkscreen extent -1.55,-19.61 42.22,1.83

## Part data
C201 C202 C203 C204 C401 C601 C602: library part C
C205 C302: library part CMP-05427-000097-1, "CAP ALUM 10UF 20% 35V SMD", Capacitance=10uF, Case/Package=Radial, ESR (Equivalent Series Resistance)=700mR, Leakage Current=3uA, Max Operating Temperature=105°C, Min Operating Temperature=-55°C, Package Quantity=1, Ripple Current=160mA, Tolerance=20%, Voltage=35V, Construction=Cylindrical, Contact Plating=Tin, Diameter=5mm, Height=5.8mm, Height - Seated (Max)=0.228inch, Impedance=700mR, Lead Free="Lead Free", Length=5.8mm, Life (Hours)=2000Hour, Material=Aluminium, Mount="Surface Mount", Number of Pins=2, Packaging="Tape and Reel", Radiation Hardening=No, Ripple Current (AC)=160mA, RoHS Compliant=Yes, Series=FK, Termination=SMD/SMT, Voltage Rating=35V, Voltage Rating (DC)=35V, Width=6.5mm
C301 C303 C304 C306: library part CMP-03422-001010-1, "CAP CER 0.1UF 50V X7R 0402 / CC0402KRX7R9BB104", Capacitance="100 nF", Manufacturer=YAGEO, Manufacturer Part Number=CC0402KRX7R9BB104, Package=CC0402, Temperature="-55°C to +125°C", Temperature Characteristic=X7R, Temperature Coefficient=30ppm/°C, Temperature Range High=+125°C, Temperature Range Low=-55°C, Tolerance=0.1, Voltage Rating="50 V", Automotive=No, Automotive Grade=NA, Category=Cap, ComponentLink2Description=Datasheet, ComponentLink2URL=http://www.yageo.com/documents/recent/UPY-GP_NP0_16V-to-50V_16.pdf, Device Class L1="Passive Components", Device Class L2=Capacitors, Device Class L3="Ceramic Capacitors", Digikey Description="CAP CER 0.1UF 50V X7R 0402", Footprint Url=http://www.yageo.com/exep/pages/download/literatures/UPY-C_GEN_24.pdf, Height=0.55mm, Ipc Land Pattern Name=CAPC10050X50, Lead Free=Yes, Material=Ceramic, Octopart=https://octopart.com/cc0402krx7r9bb104-yageo-56536067, RoHS=TRUE
C305 C308: library part C, "CC0603KRX7R0BB105"
C307: library part CMP-03422-000924-1, "CAP CER 1UF 16V X7R 0603", Capacitance="1 uF", Manufacturer=YAGEO, Manufacturer Part Number=CC0603KRX7R7BB105, Package=CC0603-DA, Temperature="-55°C to +125°C", Temperature Characteristic=X7R, Temperature Coefficient=15%, Temperature Range High=+125°C, Temperature Range Low=-55°C, Tolerance=0.1, Voltage="16 V", Automotive=No, Category=Cap, ComponentLink2Description=Datasheet, ComponentLink2URL=http://www.yageo.com/documents/recent/UPY-GPHC_X7R_6.3V-to-50V_18.pdf, Device Class L1="Passive Components", Device Class L2=Capacitors, Device Class L3="Ceramic Capacitors", Digikey Description="CAP CER 1UF 16V X7R 0603", Footprint Url=http://www.yageo.com/exep/pages/download/literatures/UPY-C_GEN_24.pdf, Height=0.9mm, Lead Free=Yes, Material=Ceramic, Mouser Description="Multilayer Ceramic Capacitor, CC Series, 1 - F, - 10%, X7R, 16 V, 0603 [1608 Metric]", Octopart=https://octopart.com/cc0603krx7r7bb105-yageo-42271928, RoHS=TRUE, Voltage Rating="16 V"
D301: library part CMP-2000-07370-2, "TVS DIODE 5.25V 17V SOT23-6", Breakdown Voltage=6V, Capacitance=3pF, Clamping Voltage=17V, Manufacturer=STMicroelectronics, Max Junction Temp=+125°C, Package=SOT23-6L, Peak Pulse Power=130W, Temperature="-40°C to +125°C", Temperature Range Low=-40°C, Automotive=No, Category=Diode, ComponentLink2Description=Datasheet, ComponentLink2URL=https://upverter.com/datasheet/23dc4ffb028d868909e80577610284b194f13213.pdf, Device Class L1="Circuit Protection", Device Class L2="ESD and Circuit Protection ICs", Device Class L3=unset, Digikey Description="TVS DIODE 5.25V 17V SOT23-6", Direction=Unidirectional, Height=1.45mm, Interface=USB,Ethernet,Other, Lead Free=Yes, Manufacturer Part Number=USBLC6-4SC6, Mouser Description="USBLC6 Series 4 Line 6 V Uni / Bi-Directional ESD Protection - SOT-23-6", Number Of Channels=4, Octopart=https://octopart.com/usblc6-4sc6-stmicroelectronics-347147, RoHS=TRUE, Standoff Height=0mm, Temperature Range High=+125°C
D302: library part CMP-2000-07149-1, "Schottky Rectifier, 700 mV, -65 to 125 degC, 2-Pin SMA, RoHS, Tape and Reel", Manufacturer=FairchildSemiconductor, Operating Temperature=-65to125°C, Package=2DO-214AC, Package Description="2-Pin Surface Mount Device, Body 4.375 x 2.725 mm", Package Reference=SMA-2, Peak Average Forward Current=1@Ta=75CA, Peak Forward Voltage=0.7V, Peak Non-Repetitive Surge Current=40A, Peak Reverse Current=200uA, Peak Reverse Repetitive Voltage=60V, Category=Rectifier, Configuration=Single, Datasheet URL=http://www.mouser.com/ds/2/149/SS16-196707.pdf, Datasheet Version="Rev. 1.9, 01/2015", Manufacturer URL=https://www.fairchildsemi.com/, Mounting=SurfaceMount, Mounting Technology=SurfaceMount, Packaging=Tape&Reel, Type=SchottkyDiode
J103: library part 796867-8, "No Description Available", Mfr_Name="TE Connectivity", RefDes=RefDes, Type=Header
J301: "USB-C (USB TYPE-C) USB 2.0 Receptacle Connector 24 (16+8 Dummy) Position Surface Mount, Right Angle; Through Hole", Package=None, Availability=Unavailable, MP=DX07S016JA1R1500, Price=None
J302: "No Description Available", Mfr_Name="TE Connectivity", RefDes=RefDes, Type=Type
J401: library part Conn_01x07_Socket
J601: "Generic connector, double row, 02x03, odd/even pin numbering scheme (row 1 odd numbers, row 2 even numbers), script generated (kicad-library-utils/schlib/autogen/connector/)", Datasheet=~, Description_="Generic connector, double row, 02x03, odd/even pin numbering scheme (row 1 odd numbers, row 2 even numbers), script generated (kicad-library-utils/schlib/autogen/connector/)", ki_fp_filters=Connector*:*_2x??_*, ki_keywords=connector
J701: library part 1924389, Manufacturer Name="Phoenix Contact", Copyright="Copyright (C) 2025 Ultra Librarian. All rights reserved.", Manufacturer Part Number=1924389, Manufacturer_Part_Number=1924389, Mfr_Name="Phoenix Contact", Part Number=1924389, Part Reference=J1, PCB Footprint=CONN_1924389_PXC
LED701 LED702 LED703: library part QTLP600C3TR, "https://sharvielectronics.com/product/yellow-led-17-21uyc-s530-a2-tr8-0805-package/", Manufacturer Name=Everlight, Copyright="Copyright (C) 2025 Ultra Librarian. All rights reserved.", Manufacturer Part Number=QTLP600C3TR, Manufacturer_Part_Number=QTLP600C3TR, Mfr_Name=Everlight, Part Number=QTLP600C3TR, PCB Footprint=LED_QTLP600C_EVE
  LED701: Part Reference=LED1
  LED702: Part Reference=LED2
  LED703: Part Reference=LED3
Q301 Q302: library part CMP-1048-00726-1, "General Purpose Transistor, NPN Silicon, 3-Pin SOT-23, Pb-Free, Tape and Reel", Manufacturer="On Semiconductor", ComponentLink1Description="Manufacturer URL", ComponentLink1URL=http://www.onsemi.com/, ComponentLink2Description=Datasheet, ComponentLink2URL=http://www.onsemi.cn/pub_link/Collateral/BC846ALT1-D.PDF, ComponentLink3Description="Package Specification", ComponentLink3URL=http://www.onsemi.cn/pub_link/Collateral/318-08.PDF, DatasheetVersion="Rev. 11", fT Min (MHz)=100, IC Continuous (A)=0.1, Mounting Technology="Surface Mount", PackageDescription="3-Pin Small Outline Transistor, Body 2.92 x 1.3 mm, Pitch 0.95 mm", PackageReference=SOT-23-3-318-08, PackageVersion="Rev. AP, 11/2009", Packing="Tape and Reel", PartNumber=BC849CLT1G, Polarity=NPN, RoHS=TRUE
Q701 Q702 Q703 Q704 Q705 Q706 Q707 Q708 Q709 Q710: library part CMP-02550-000051-1, "MOSFET N-CH 100V 1.15A SOT23-3", Continuous Drain Current=1.15A, Drain To Source Breakdown Voltage=100V, Drain To Source Resistance=0.195Ω, Gate To Source Voltage=20V, Manufacturer=Vishay, Manufacturer Part Number=SI2328DS-T1-E3, Max Forward Diode Voltage=1.2V, Max Junction Temp=+150°C, Package=S-03946, Power Dissipation=0.73W, Pulse Drain Current=6A, Temperature="-55°C to +150°C", Temperature Range Low=-55°C, Typ Forward Diode Voltage=0.8V, Automotive=No, Category=Trans, ComponentLink2Description=Datasheet, ComponentLink2URL=http://www.vishay.com/docs/71796/si2328ds.pdf, Depletion Mode=False, Device Class L1="Discrete Semiconductors", Device Class L2=Transistors, Device Class L3=MOSFETs, Digikey Description="MOSFET N-CH 100V 1.15A SOT23-3", Drain To Source Voltage=100V, Gate Charge At Vgs="3.3nC @ 10V", Height=1.12mm, Ipc Land Pattern Name=SOT95P237X100-3, Lead Free=Yes, Mouser Description="MOSFET 100V 1.5A", Number Of Channels=1, Number Of N Channels=1, Octopart=https://octopart.com/si2328ds-t1-e3-vishay-40951139, Reverse Recovery Time=50ns, RoHS=TRUE, Rthja Max=130°C/W, Standoff Height=0.01mm, Temperature Range High=+150°C, Threshold Vgs Max=4V, Threshold Vgs Min=2V, Transconductance=4S, Turn Off Delay Time=9ns, Turn On Delay Time=7ns
R101 R102 R103 R104 R108 R109 R110 R111 R112 R113 R201 R601 R602: library part R
R301 R303: library part CMP-2002-01790-3, "RES 10kΩ ±1% 0.063W 0402", Case Code (Imperial)=0402, Case Code (Metric)=1005, Max Operating Temperature=155°C, Max Power Dissipation=63mW, Min Operating Temperature=-55°C, Power Rating=62.5mW, Resistance=10kR, Resistor Type="Thick Film", Temperature Coefficient=100ppm/°C, Tolerance=1%, Voltage Rating=50V, Case/Package=0402, Construction=Rectangular, Depth=0.5mm, Features="Moisture Resistant", Height=0.015inch, Lead Free="Lead Free", Length=0.039inch, Military Standard=Not, Number of Terminations=2, Packaging="Tape and Reel", RoHS Compliant=Yes, Series=AC, Size Code=0402, Termination=SMD/SMT, Width=0.02inch
R302 R307: library part CMP-2100-03664-2, "RES 10K OHM 1% 1/10W 0603 / RC0603FR-0710KL", Case Code (Imperial)=0603, Case Code (Metric)=1608, Max Operating Temperature=155°C, Max Power Dissipation=100mW, Min Operating Temperature=-55°C, Resistance=10kR, Resistance Tolerance=1%, Resistor Type="Thick Film", Temperature Coefficient=100ppm/°C, Voltage Rating=75V, Voltage Rating (DC)=50V, Case/Package=0603, Construction=Rectangular, Depth=0.8mm, Features="Moisture Resistant", Height=0.45mm, Lead Free="Lead Free", Lead Pitch=0.3mm, Length=1.6mm, Military Standard=Not, Number of Pins=2, Number of Terminations=2, Packaging="Tape and Reel", Power Rating=100mW, RoHS Compliant=Yes, Series=RC, Size Code=0603, Termination=SMD/SMT, Tolerance=1%, Weight=7.1E-05oz, Width=0.8mm
R304 R305: library part CMP-2002-07753-1, "RC0402FR-075K1L", Manufacturer="Yageo / Phycomp", Part Number=RC0402FR-075K1L
R306: library part CMP-2002-07472-3, "RES 1K OHM 1% 1/16W 0402 / RC0402FR-071KL", Case Code (Imperial)=0402, Case Code (Metric)=1005, Max Operating Temperature=155°C, Max Power Dissipation=63mW, Min Operating Temperature=-55°C, Power Rating=62.5mW, Resistance=1kR, Resistance Tolerance=1%, Resistor Type="Thick Film", Temperature Coefficient=100ppm/°C, Voltage Rating=50V, Case/Package=0402, Construction=Rectangular, Depth=0.5mm, Features="Moisture Resistant", Height=0.32mm, Lead Free="Lead Free", Length=1mm, Military Standard=Not, Number of Pins=2, Number of Terminations=2, Packaging="Tape and Reel", Reach SVHC Compliant=Yes, RoHS Compliant=Yes, Series=RC, Size Code=0402, Technology="THICK FILM", Termination=SMD/SMT, Tolerance=1%, Voltage Rating (DC)=50V, Width=0.5mm
R308: library part CMP-26527-005902-1, "22.1kΩ ±1% 0.1W 0603 Thick Film Chip Resistor AEC-Q200 compliant / RMCF0603FT22K1", Case Code (Imperial)=0603, Case Code (Metric)=1608, Max Operating Temperature=155°C, Max Power Dissipation=100mW, Min Operating Temperature=-55°C, Package Quantity=1, Resistance=22.1kR, Resistor Type="Thick Film", Temperature Coefficient=100ppm/°C, Tolerance=1%, Case/Package=0603, Construction=Rectangular, Contact Plating=Tin, Depth=0.8mm, Features="Automotive AEC-Q200", Height=0.022inch, Lead Free="Lead Free", Length=0.061inch, Military Standard=Not, Mount="Surface Mount", Number of Terminations=2, Packaging="Tape and Reel", Power Rating=100mW, Radiation Hardening=No, RoHS Compliant=Yes, Series=RMCF, Size Code=0603, Width=0.031inch
R309: library part CMP-03412-027829-2, "RES 47.5KΩ 1.00% 0.1W 0603 / AC0603FR-0747K5L", Case Code (Imperial)=0603, Case Code (Metric)=1608, Max Operating Temperature=155°C, Max Power Dissipation=100mW, Min Operating Temperature=-55°C, Ratings=AEC-Q200, Resistance=47.5kR, Resistor Type="Thick Film", Temperature Coefficient=100ppm/°C, Tolerance=1%, Voltage Rating=50V, Case/Package=0603, Features="Moisture Resistant", Height=0.022inch, Length=0.063inch, Number of Terminations=2, Packaging="Tape and Reel", Power Rating=100mW, RoHS Compliant=Yes, Series=AC, Termination=SMD/SMT, Width=0.8mm
R701 R702 R703 R704 R708: library part CMP-1012-00595-2, "Chip Resistor, 5.6 KOhm, +/- 1%, 0.1 W, -55 to 155 degC, 0603 (1608 Metric), RoHS, Tape and Reel", Case Code (Imperial)=0603, Case Code (Metric)=1608, Max Operating Temperature="155 degC", Min Operating Temperature="-55 degC", Package Quantity=5000, Power Rating="100 mW", Resistance="332 kohm", Tolerance=1%, Type (Resistor)="Thick Film", Voltage Rating="50 V", Case\Package=0603, ComponentLink1Description="Manufacturer URL", ComponentLink1URL=http://www.yageo.com/, ComponentLink2Description=Datasheet, ComponentLink2URL=http://www.yageo.com/documents/recent/PYu-RC_Group_51_RoHS_L_04.pdf, DatasheetVersion="Rev. 4, 02/2016", Height="0.45 mm", Length="1.6 mm", PackageDescription="2-Pin Surface Mount Device, Body 1.6 x 0.8 mm", PackageReference=0603, Packaging="Tape and Reel", RoHSCompliant=true, Width="0.8 mm"
R705 R706 R707: library part CRGCQ0402F100K, Manufacturer Part Number=RCT02470RF, Mfr_Name="Unified Resistive Technologies", Copyright="Copyright (C) 2025 Ultra Librarian. All rights reserved.", Manufacturer_Part_Number=RCT02470RF, Part Number=RCT02470RF, PCB Footprint=RES_CRGCQ0402F100K_TEC
  R705: Part Reference=R1
  R706: Part Reference=R2
  R707: Part Reference=R3
U101 U102: library part DCDC_StepDown_LM2596
U103 U104: library part CMP-10112-000010-1, "IC I/O EXPANDER I2C 8B 16SOIC", Ambient Temperature Range High=+85°C, Ambient Temperature Range Low=-40°C, Frequency=100kHz, Manufacturer="NXP Semiconductors", Max Junction Temp=+125°C, Max Supply Voltage=6V, Min Supply Voltage=2.5V, Nominal Supply Current=40uA, Package=SOT162-1, Temperature="-40°C to +85°C", Automotive=No, Category=IC, ComponentLink2Description=Datasheet, ComponentLink2URL=https://www.nxp.com/docs/en/data-sheet/PCF8574_PCF8574A.pdf, Device Class L1="Integrated Circuits (ICs)", Device Class L2="Interface ICs", Device Class L3="I/O Expanders", Digikey Description="IC I/O EXPANDER I2C 8B 16SOIC", Footprint Url=https://www.nxp.com/docs/en/package-information/SOT162-1.pdf, Height=2.65mm, Interface=I2C, Ipc Land Pattern Name=SOIC127P1032X265-16, Lead Free=Yes, Manufacturer Part Number=PCF8574T/3,518, Mouser Description="PCF8574 Series 2.5 - 6V Remote 8-bit I/O Expander for I2C-bus - SOIC-16", Number Of I/Os=8, Octopart=https://octopart.com/pcf8574t%2F3%2C518-nxp+semiconductors-10470852, RoHS=TRUE, Standoff Height=0.1mm, Temperature Range High=+85°C, Temperature Range Low=-40°C
U201: library part SA868
U301: "No Description Available", Mfr_Name="Espressif Systems", RefDes=RefDes, Type=Type
U302 U303: "No Description Available", Mfr_Name=Omron, RefDes=RefDes, Type=Type
U304: library part CMP-08093-000007-1, "IC USB TO UART BRIDGE QFN28"
U701: library part ULN2803ADW, Manufacturer Name="Texas Instruments", Copyright="Copyright (C) 2025 Ultra Librarian. All rights reserved.", Manufacturer Part Number=ULN2803ADW, Manufacturer_Part_Number=ULN2803ADW, Mfr_Name="Texas Instruments", Part Number=ULN2803ADW, Part Reference=U4, PCB Footprint=DW18
Y601: library part HC49US-10.244MHZ-16PF-30-EXT-SMD-H32-TR, "https://sharvielectronics.com/product/hc-49smd-8mhz-surface-mount-crystal-20pf-oscillator-x49sm8msd2sc/\", Mfr_Name="Rami Technology"

## Via types
v1: diameter 0.254, hole 0.15, Top Layer to Bottom Layer, tented both sides, 126 vias
v2: diameter 0.254, hole 0.15, Top Layer to Bottom Layer, 46 vias
v3: diameter 1.27, hole 0.711, Top Layer to Bottom Layer, 12 vias
v4: diameter 1.27, hole 0.711, Top Layer to Bottom Layer, tented both sides, 1 vias

## Nets (pads, with @x,y where several pads share a name; then routed paths per layer and width w, separated by ;. In a path a pad name is that pad's centre, name@x,y a point inside that pad or via, vN(x,y) a via of type N, cw(c..) or ccw(c..) an arc to the next point about the centre after c; other vN are vias at no path point)
+3.3V: C301.1 C302.2 C307.1 J302.18 R101.1 R108.1 R109.1 R110.1 R111.1 R112.1 R113.1 R302.2 R306.2 R705.2 R706.2 R707.2 U101.4 U103.16 U104.16 U301.2 U304.6 U304.7 | length 539.2
  Top Layer w0.125: U304.7@-104.9,-17.1 -104.9,-16.335 v1@-104.7,-16.135 ; v1(-104.7,-16.1) -104.4,-16.4 U304.6@-104.4,-17.1 ; v1(-101,-15.5) C307.1@-101,-14.75
  Top Layer w0.254: R101.1@-149.987,-17.256 -149.987,-52.705 v1(-148.463,-54.229) ; R302.2@-124.6,-20.577 -124.523,-20.5 v1(-123.9,-20.5)
  Top Layer w0.45: v1(-28.575,-41.656) -28.695,-41.536 -30.161,-41.536 U103.16@-30.336,-41.361 -30.161,-41.186 -29.136,-41.186 -29.097,-41.148 v1(-28.575,-41.148)
  Top Layer w0.5: v1(-122.476,-54.229) -117.396,-54.229 -117.396,-43.482 v3@-112.9,-38.986 ; R306.2@-109.1,-21.121 v1(-109.1,-20.5) ; v3(-103.7,-35.1) -100.8,-35.1 -93,-27.3 C302.2@-93,-26.7 ; C307.1@-101,-14.75 -95.55,-14.75 ; U301.2@-81.15,-26.4 -83.046,-26.4 -83.696,-25.75 C301.1@-85.25,-25.75 -86.2,-26.7 C302.2@-93,-26.7 ; J302.18@-73.88,-7.02 -75.154,-5.746 -77.186,-5.746 -79.337,-3.595 -84.395,-3.595 -95.55,-14.75 ; v3@-51.065,-45.9 -48.656,-45.9 R112.1@-48.65,-45.906 ; -51.065,-45.753 -48.65,-43.337 R113.1@-48.65,-43.112 ; R111.1@-48.667,-48.768 -48.667,-48.543 -51.163,-46.047 -51.553,-46.047 v3(-51.7,-45.9) -51.7,-16.3 -49.219,-13.819 R705.2@-38.1,-13.819 R706.2@-35.052,-13.819 R707.2@-32.004,-13.819 ; U104.16@-25.45,-73.791 -27.791,-73.791 -29.7,-75.7 v3(-29.7,-92.1) -29.637,-92.037 -21.399,-92.037 R110.1@-21.336,-91.974 -20.936,-92.374 -20.462,-92.374 -18.703,-94.133 R109.1@-18.479,-94.133 -18.078,-94.533 -17.351,-94.533 -15.846,-96.038 R108.1@-15.621,-96.038 ; -95.55,-14.75 -93,-17.3 C302.2@-93,-26.7
  Top Layer w1: v1(-125.476,-54.229) v1(-124.726,-54.229) v1(-123.976,-54.229) v1(-123.226,-54.229) v1(-122.476,-54.229) v1(-122.476,-54.737) -122.476,-55.384 -123.698,-56.606 U101.4@-123.698,-57.023 -123.698,-90.902 v3(-122,-92.6)
  Bottom Layer w0.125: v1(-104.7,-16.1) -101.6,-16.1 v1(-101,-15.5)
  Bottom Layer w0.254: v1(-148.463,-54.229) v1(-125.476,-54.229) ; v1(-123.9,-20.5) v1(-109.1,-20.5) v1(-104.7,-16.1)
  Bottom Layer w0.5: v1(-122.476,-54.737) v1(-122.476,-54.229) -117.116,-48.869 -54.669,-48.869 v3(-51.7,-45.9) -33.327,-45.9 v1(-28.575,-41.148) ; v3(-122,-92.6) -108.119,-92.6 -101.319,-99.4 -35.8,-99.4 -32.596,-96.196 -32.596,-95.959 -31.803,-95.166 -31.566,-95.166 -29.847,-93.447 -29.847,-92.247 v3(-29.7,-92.1) ; v3(-112.9,-39) -109,-35.1 v3(-103.7,-35.1)
+5V: C202.2 C203.2 C204.1 C205.2 C401.1 J401.6 R102.1 R201.1 R602.2 U102.4 U201.6 U201.8 U202.4 U601.18 U602.3 | length 289.4
  Top Layer w0.254: R102.1@-149.987,-12.176 -150.434,-12.623 -150.434,-13.938 -151.068,-14.572 -151.068,-53.275 U102.4@-147.193,-57.15 ; J401.6@-131.699,-47.205 -130.468,-45.974 -126.276,-45.974 -124.968,-47.282 C401.1@-124.968,-47.344 ; U601.18@-30.435,-56.515 -27.559,-56.515 -27.29,-56.246 R602.2@-25.238,-56.246
  Top Layer w0.5: U201.6@-68.824,-57.879 U201.6@-68.824,-57.454 ; U202.4@-67.564,-85.09 -67.368,-84.894 -66.844,-84.894 -66.759,-84.809 C202.2@-64.262,-84.809 C203.2@-62.23,-84.809 ; U201.8@-59.924,-60.114 U201.8@-59.908,-60.098 ; C204.1@-55.245,-60.098 C204.1@-55.228,-60.114 ; v1(-54.3,-78.5) v1(-53.833,-78.5) v1(-53.367,-78.5) v1(-52.9,-78.5) -51.322,-78.5 C205.2@-51.308,-78.486 -40.904,-78.486 -38.707,-76.289 -38.707,-75.505 -39.536,-74.676 U602.3@-40.036,-74.676
  Top Layer w0.75: U201.6@-68.824,-57.879 -66.589,-60.114 U201.8@-60.349,-60.114 ; v3(-66.6,-62.416) -62.651,-62.416 U201.8@-60.349,-60.114 ; C203.2@-62.23,-84.809 -62.221,-84.8 v1(-61.5,-84.8) ; U201.8@-59.924,-60.114 U201.8@-60.349,-60.114 ; U201.8@-59.908,-60.098 C204.1@-55.245,-60.098 ; C204.1@-55.228,-60.114 -54.313,-60.114 -53.086,-61.341 -53.086,-76.108 C205.2@-51.308,-77.886 ; v4(-33.1,-57.8) -31.84,-56.54 -30.46,-56.54 U601.18@-30.435,-56.515
  Top Layer w1: U102.4@-147.193,-57.15 -147.193,-52.593 -145.4,-50.8 -134,-50.8 -131.714,-48.514 -131.714,-47.22 J401.6@-131.699,-47.205 ; R201.1@-69.316,-53.467 -69.316,-53.692 -68.824,-54.184 U201.6@-68.824,-57.454
  Bottom Layer w0.5: v1(-61.2,-84.8) -54.9,-78.5 v1(-54.3,-78.5)
  Bottom Layer w0.75: U102.4@-147.193,-57.15 -141.679,-62.664 -107.1,-62.664 -102.936,-58.5 -70.516,-58.5 v3(-66.6,-62.416) -37.116,-62.416 -35.158,-60.458 -35.158,-59.858 v4(-33.1,-57.8)